# Altium PCB reflex.PcbDoc
Units mm, origin at the board's own origin, x right, y up, seen from the top; angles counter-clockwise.
Board outline 31.75 x 114.3 mm, 2 copper layers (Top Layer, Bottom Layer); 27 components, 22 nets, 88 pads, 21 vias.
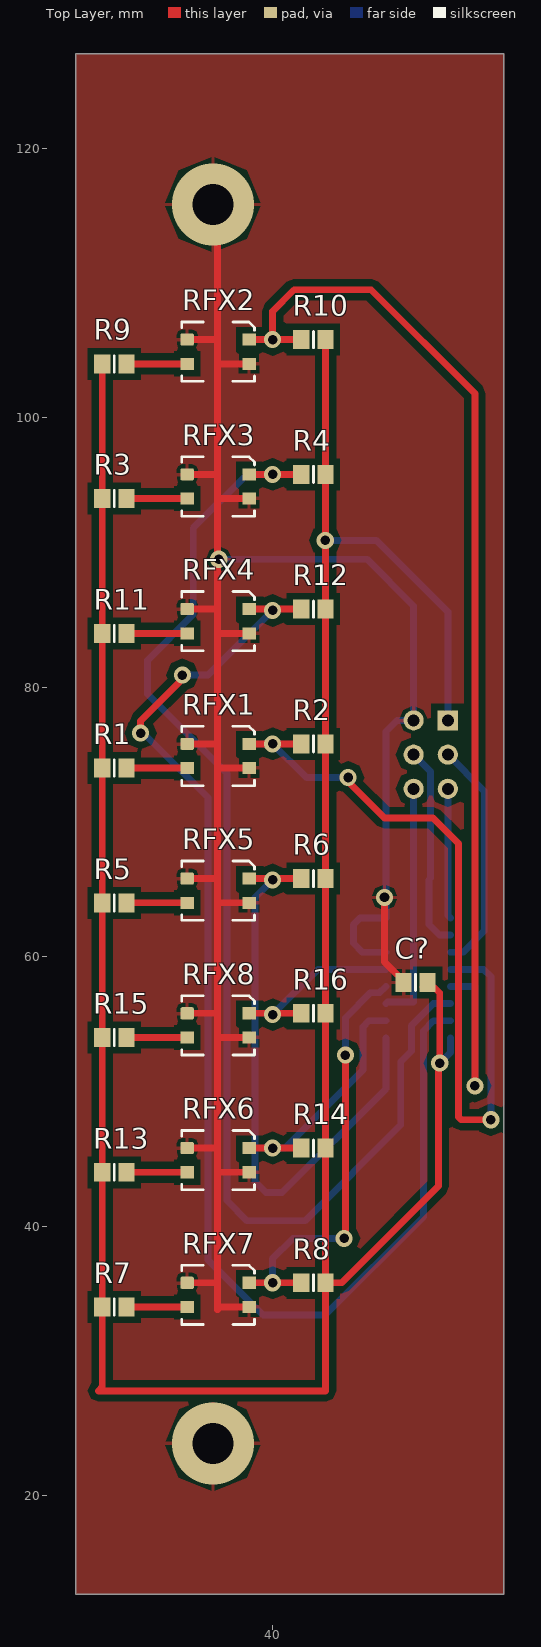
[diagram p0: Top Layer view]
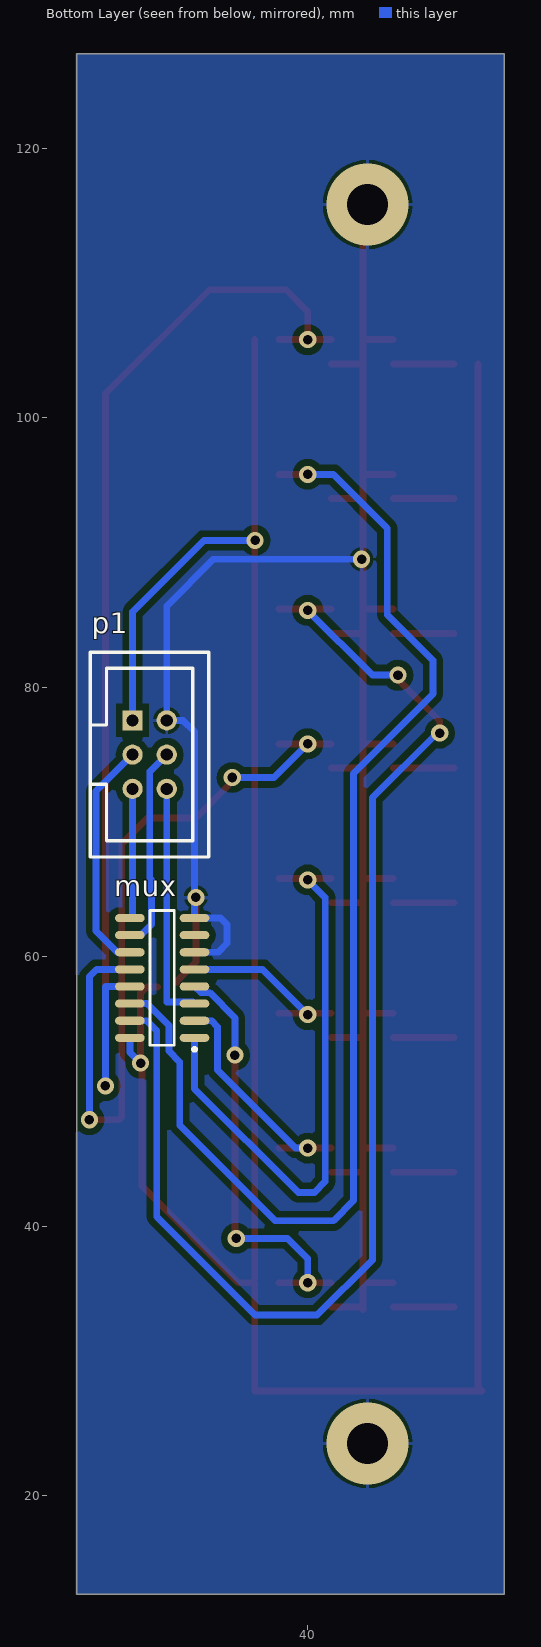
[diagram p1: Bottom Layer view, seen from below]

## Layer stack, top to bottom
Top Solder: solder mask 0.0102, Solder Resist, Dk 3.5
Top Layer: signal copper 0.0356
Dielectric1: dielectric 0.32, FR-4, Dk 4.8
Bottom Layer: signal copper 0.0356
Bottom Solder: solder mask 0.0102, Solder Resist, Dk 3.5

## Board outline
25.4,127 25.4,12.7 57.15,12.7 57.15,127

## Design rules (kind name [scope] priority, off if disabled: settings)
Clearance [All] p1: gap=0.254 except(0.504: Arc-Fill Arc-Poly Track-Fill Track-Poly SMDPad-Fill SMDPad-Poly THPad-Fill THPad-Poly Via-Fill Via-Poly Fill-Fill Fill-Poly Fill-Region Fill-Text Poly-Poly Poly-Region Poly-Text)
HoleSize [All] p1: absolutevalues=TRUE maxlimit=2539.975 minlimit=0.025 maxpercent=80.000 minpercent=20.000
MinimumSolderMaskSliver [All] p1: minsoldermaskwidth=0.025
PlaneClearance [All] p1: clearance=1.016
PolygonConnect [All] p1: connectstyle=Relief reliefconductorwidth=0.254 reliefentries=4 polygonreliefangle="90 Angle" airgapwidth=0.254
RoutingVias [All] p1: holewidth=0.711 width=1.27 viastyle="Through Hole" minholewidth=0.711 minwidth=1.27 maxholewidth=126.949 maxwidth=127
SilkToSilkClearance [All] p1: silktosilkclearance=0
SilkToSolderMaskClearance [IsPad] p1: minsilkscreentomaskgap=0.025 clearancetoexposedcopper=TRUE
SolderMaskExpansion [All] p1: expansion=0.102
Width [All] p1: maxlimit=1016 minlimit=0.508 preferedwidth=0.508
25 further rules are at their usual default settings.

## Components (designator, comment, footprint, x,y, rotation, side; value= is the part's Value field where it differs from the comment)
C? "Cap" 6-0805_N 50.6,58.1 r0 top
mux "mux" SO-16_N 50.8,58.425 r0 bottom
p1 "IDC6" IDC6 51.73,75 r180 bottom
R1 "Res2" 6-0805_N 28.25,74 r180 top
R2 "Res2" 6-0805_N 43.025,75.8 r0 top
R3 "Res2" 6-0805_N 28.25,94 r180 top
R4 "Res2" 6-0805_N 43.025,95.8 r0 top
R5 "Res2" 6-0805_N 28.25,64 r180 top
R6 "Res2" 6-0805_N 43.025,65.8 r0 top
R7 "Res2" 6-0805_N 28.25,34 r180 top
R8 "Res2" 6-0805_N 43.025,35.8 r0 top
R9 "Res2" 6-0805_N 28.25,104 r180 top
R10 "Res2" 6-0805_N 43.025,105.8 r0 top
R11 "Res2" 6-0805_N 28.25,84 r180 top
R12 "Res2" 6-0805_N 43.025,85.8 r0 top
R13 "Res2" 6-0805_N 28.25,44 r180 top
R14 "Res2" 6-0805_N 43.025,45.8 r0 top
R15 "Res2" 6-0805_N 28.25,54 r180 top
R16 "Res2" 6-0805_N 43.025,55.8 r0 top
RFX1 "ITR1201" "LCC4 - duplicate4" 33.65,75.8 r0 top
RFX2 "ITR1201" "LCC4 - duplicate4" 33.65,105.8 r0 top
RFX3 "ITR1201" "LCC4 - duplicate4" 33.65,95.8 r0 top
RFX4 "ITR1201" "LCC4 - duplicate4" 33.65,85.8 r0 top
RFX5 "ITR1201" "LCC4 - duplicate4" 33.65,65.8 r0 top
RFX6 "ITR1201" "LCC4 - duplicate4" 33.65,45.8 r0 top
RFX7 "ITR1201" "LCC4 - duplicate4" 33.65,35.8 r0 top
RFX8 "ITR1201" "LCC4 - duplicate4" 33.65,55.8 r0 top

## Footprints (in the part's own frame and the unit in brackets; to place one, negate y for a bottom-side part, rotate by r counter-clockwise, add the part's x,y. Pads: shape width x height; smd on the part's side, far side on the other; paste and mask are expansions set on the pad)
6-0805_N [mm] "Chip Resistor, Body 2.0x1.2mm, IPC Medium Density"
  rect 1.2x1.4 smd: 1(-0.9,0) 2(0.9,0)
  silkscreen extent 0,-0.6 0,0.6, body extent -1.07,-0.7 1.07,0.7, height 0.7
IDC6 [mm]
  rect 1.5x1.5 hole 0.9: 1(-1.27,2.54)
  round 1.5 hole 0.9: 2(1.27,2.54) 3(-1.27,0) 4(1.27,0) 5(-1.27,-2.54) 6(1.27,-2.54)
  silkscreen extent -4.4,-7.6 4.4,7.6, body extent -4.4,-7.6 4.4,7.6, height 9.1
"LCC4 - duplicate4" [mm]
  rrect25% 1x0.9 smd: 1(0,0)
  rect 1x0.9 smd: 2(0,-1.8) 3(4.6,-1.8) 4(4.6,0)
  silkscreen extent -0.4,-3.1 5,1.3, body extent 0.6,-2.8 4,1, height 1.5
SO-16_N [mm] "SOIC, 16-Leads, Body 9.9x3.9mm, Pitch 1.27mm, IPC Medium Density"
  oval 2.2x0.6 smd: 1(-2.4,4.445) 2(-2.4,3.175) 3(-2.4,1.905) 4(-2.4,0.635) 5(-2.4,-0.635) 6(-2.4,-1.905) 7(-2.4,-3.175) 8(-2.4,-4.445) 9(2.4,-4.445) 10(2.4,-3.175) 11(2.4,-1.905) 12(2.4,-0.635) 13(2.4,0.635) 14(2.4,1.905) 15(2.4,3.175) 16(2.4,4.445)
  silkscreen extent -2.52,-5 0.9,5.42, body extent -2,-5 2,5, height 1.75

## Part data
C?: "Capacitor"
p1: "6pin IDC connector"
R1 R2 R3 R4 R5 R6 R7 R8 R9 R10 R11 R12 R13 R14 R15 R16: "Resistor"

## Via types
v1: diameter 1.27, hole 0.711, Top Layer to Bottom Layer, 19 vias
v2: diameter 6.096, hole 3.048, Top Layer to Bottom Layer, 2 vias

## Nets (pads, with @x,y where several pads share a name; then routed paths per layer and width w, separated by ;. In a path a pad name is that pad's centre, name@x,y a point inside that pad or via, vN(x,y) a via of type N, cw(c..) or ccw(c..) an arc to the next point about the centre after c; other vN are vias at no path point)
GND: C?.1 mux.6 mux.8 p1.2 RFX1.1 RFX1.3 RFX2.1 RFX2.3 RFX3.1 RFX3.3 RFX4.1 RFX4.3 RFX5.1 RFX5.3 RFX6.1 RFX6.3 RFX7.1 RFX7.3 RFX8.1 RFX8.3 | length 176.6
  Top Layer w0.508: RFX7.1 35.9,35.8 ; RFX6.1 35.9,45.8 ; RFX8.1 35.8,55.8 35.9,55.7 ; RFX5.1 35.8,65.8 35.9,65.9 ; RFX1.1 35.8,75.8 35.9,75.9 ; RFX4.1 35.9,85.8 ; RFX3.1 35.9,95.8 ; RFX2.1 35.8,105.8 35.9,105.7 ; v2(35.56,23.876) v2@35.56,26.673 ; v2(35.56,115.824) 35.9,115.484 35.9,105.7 ; RFX7.3 36.1,34 35.9,33.8 35.9,35.8 ; RFX6.3 36,44 35.9,44.1 ; RFX8.3 36,54 35.9,53.9 ; RFX5.3 36,64 35.9,64.1 ; RFX1.3 36,74 35.9,74.1 ; RFX4.3 35.9,84 ; RFX3.3 36,94 35.9,93.9 ; RFX2.3 35.9,104 ; v1(48.3,64.4) 48.3,59.6 49.7,58.2 C?.1 ; 35.9,35.8 35.9,44.1 ; 35.9,44.1 35.9,45.8 ; 35.9,45.8 35.9,53.9 ; 35.9,53.9 35.9,55.7 ; 35.9,55.7 35.9,64.1 ; 35.9,64.1 35.9,65.9 ; 35.9,65.9 35.9,74.1 ; 35.9,74.1 35.9,75.9 ; 35.9,75.9 35.9,84 ; 35.9,84 35.9,85.8 ; 35.9,85.8 35.9,93.9 ; 35.9,93.9 35.9,95.8 ; 35.9,95.8 35.9,104 ; 35.9,104 35.9,105.7
  Bottom Layer w0.508: v1@35.8,89.5 v1(36,89.5) 47,89.5 50.46,86.04 p1.2 49.24,77.54 48.4,76.7 mux.8 46.47,62.87 46,62.4 46,61 46.67,60.33 mux.6
Netmux_1: mux.1 R6.1 RFX5.4 | length 43.8
  Top Layer w0.508: RFX5.4 R6.1
  Bottom Layer w0.508: v1(40,65.7) 38.7,64.4 38.7,43.3 39.5,42.5 40.7,42.5 48.4,50.2 mux.1
Netmux_2: mux.2 R14.1 RFX6.4 | length 18.1
  Top Layer w0.508: RFX6.4 v1(40,45.8) R14.1
  Bottom Layer w0.508: v1(40,45.8) 40.9,45.8 46.7,51.6 46.7,54.8 47.15,55.25 mux.2
Netmux_3: mux.3 p1.6 | length 17.9
  Bottom Layer w0.508: mux.3 48.52,56.64 50.46,56.64 p1.6
Netmux_4: mux.4 R8.1 RFX7.4 | length 32
  Top Layer w0.508: RFX7.4 v1(40,35.8) R8.1 ; v1@45.4,39 v1(45.4,52.7)
  Bottom Layer w0.508: v1(40,35.8) 40,37.6 41.5,39.1 v1(45.3,39.1) ; v1(45.4,52.7) 45.4,55.463 47.265,57.328 47.938,57.328 mux.4
Netmux_5: mux.5 R16.1 RFX8.4 | length 13.7
  Top Layer w0.508: RFX8.4 R16.1
  Bottom Layer w0.508: v1(40,55.7) 43.36,59.06 mux.5
Netmux_9: mux.9 p1.5 | length 9.7
  Bottom Layer w0.508: p1.5 53,63.07 mux.9
Netmux_10: mux.10 p1.4 | length 15.1
  Bottom Layer w0.508: p1.4 51.718,73.742 51.718,65.826 51.592,65.7 51.592,62.392 52.384,61.6 mux.10
Netmux_11: mux.11 p1.3 | length 17.4
  Bottom Layer w0.508: p1.3 55.7,72.3 55.7,61.9 54.13,60.33 mux.11
Netmux_12: mux.12 R2.1 RFX1.4 | length 57.4
  Top Layer w0.508: RFX1.4 R2.1 ; v1@45.6,73 48.3,70.3 51.9,70.3 53.8,68.4 53.8,48.1 54,47.9 v1(56.2,47.9)
  Bottom Layer w0.508: v1(40,75.8) 42.5,73.3 v1(45.6,73.3) ; mux.12 55.66,59.06 56.2,58.52 v1(56.2,47.9) v1@56.3,47.8
Netmux_13: mux.13 R10.1 RFX2.4 | length 85.6
  Top Layer w0.508: RFX2.4 v1(40,105.8) ; R10.1 v1(40,105.8) ; v1(55.01,50.41) 55.01,101.79 47.3,109.5 41.6,109.5 40,107.9 v1(40,105.8)
  Bottom Layer w0.508: mux.13 55.01,57.79 v1(55.01,50.41) v1@54.9,50.3
Netmux_14: mux.14 R4.1 RFX3.4 | length 92.9
  Top Layer w0.508: RFX3.4 v1(40,95.8) R4.1
  Bottom Layer w0.508: v1(40,95.8) 38.1,95.8 34.1,91.8 34.1,85.4 30.7,82 30.7,79.5 36.6,73.6 36.6,41.9 38.1,40.4 42.4,40.4 49.5,47.5 49.5,52.2 50.3,53 50.3,54.9 51.92,56.52 mux.14
Netmux_15: mux.15 R12.1 RFX4.4 | length 95.6
  Top Layer w0.508: v1(30.2,76.6) 30.2,77.5 v1@33.4,80.7 ; RFX4.4 R12.1
  Bottom Layer w0.508: v1@30.6,76.4 35.2,71.8 35.2,37.5 39.3,33.4 43.9,33.4 51.2,40.7 51.2,54.5 51.95,55.25 mux.15 ; v1(33.3,80.9) 35.2,80.9 v1(40,85.7)
NetR1_1: R1.1 RFX1.2 | length 4.5
  Top Layer w0.508: R1.1 RFX1.2
NetR3_1: R3.1 RFX3.2 | length 4.5
  Top Layer w0.508: R3.1 RFX3.2
NetR5_1: R5.1 RFX5.2 | length 4.5
  Top Layer w0.508: R5.1 RFX5.2
NetR7_1: R7.1 RFX7.2 | length 4.5
  Top Layer w0.508: R7.1 RFX7.2
NetR9_1: R9.1 RFX2.2 | length 4.5
  Top Layer w0.508: R9.1 RFX2.2
NetR11_1: R11.1 RFX4.2 | length 4.5
  Top Layer w0.508: R11.1 RFX4.2
NetR13_1: R13.1 RFX6.2 | length 4.5
  Top Layer w0.508: R13.1 RFX6.2
NetR15_1: R15.1 RFX8.2 | length 4.5
  Top Layer w0.508: R15.1 RFX8.2
VCC: C?.2 mux.16 p1.1 R1.2 R2.2 R3.2 R4.2 R5.2 R6.2 R7.2 R8.2 R9.2 R10.2 R11.2 R12.2 R13.2 R14.2 R15.2 R16.2 | length 219.6
  Top Layer w0.508: R9.2 R3.2 R11.2 R1.2 R5.2 R15.2 R13.2 R7.2 27.35,28.05 27.075,27.775 43.925,27.775 R8.2 45.12,35.8 52.3,42.98 v1@52.3,52.1 ; R8.2@43.925,36.125 R14.2 R16.2 R6.2 R2.2 R12.2 R4.2 R10.2 ; C?.2@51.15,57.75 51.95,57.75 52.4,57.3 v1(52.4,52.1)
  Bottom Layer w0.508: v1(43.9,90.9) 47.7,90.9 53,85.6 p1.1 ; v1(52.4,52.1) 53.2,52.9 mux.16
pads on no net: mux.7

## Polygon pours and split planes (outlines as drawn)
GND on Bottom Layer "Bottom Layer-No Net" (solid, pour order 4): 25.4,127 57.2,127 57.2,12.7 25.4,12.7
GND on Top Layer "Bottom Layer-No Net" (solid, pour order 6): 25.4,127 57.2,127 57.2,12.7 25.4,12.7